# EAGLE board Keyboard_TOP (EAGLE 8.2.2)
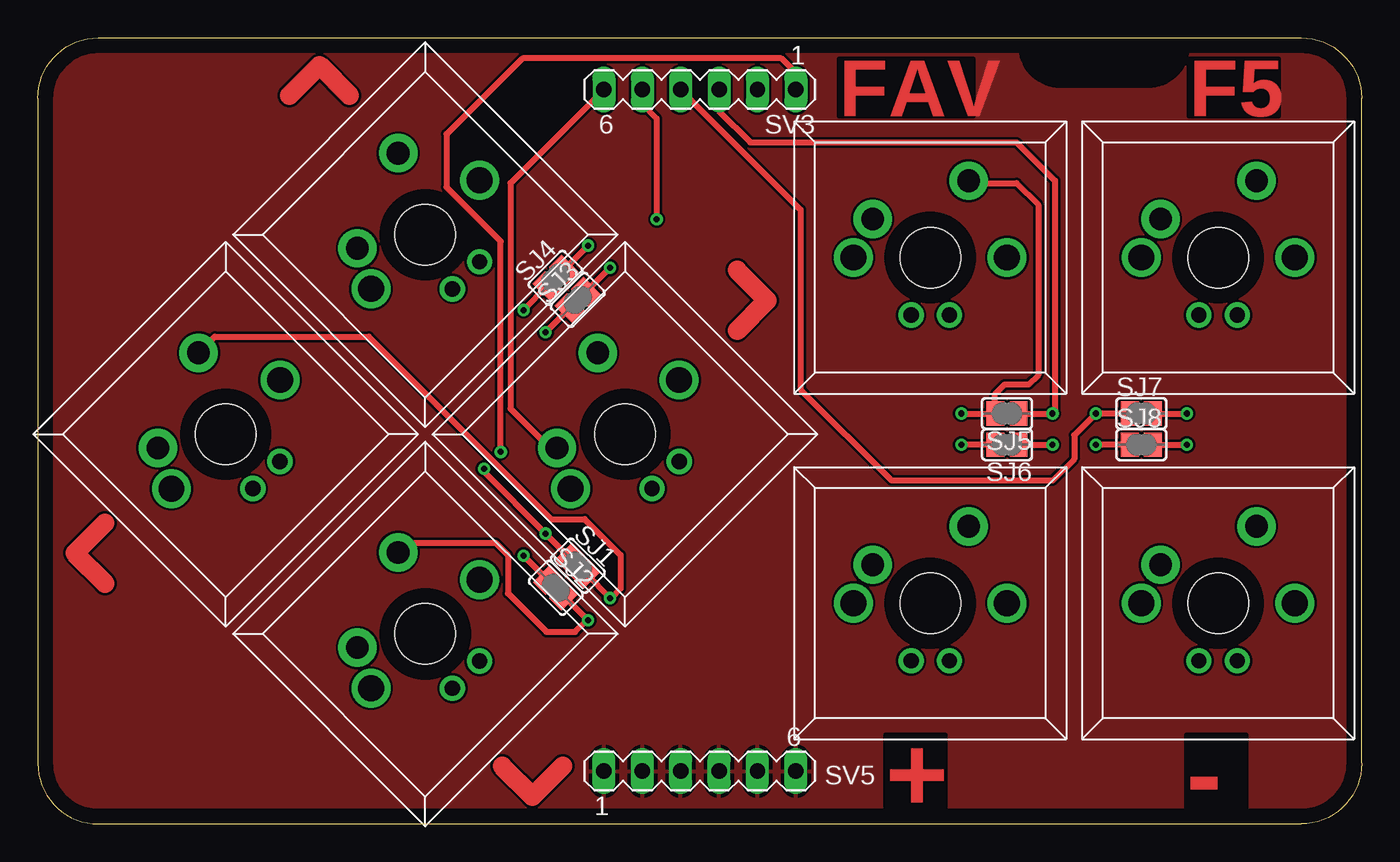
[diagram p0: board, top side]
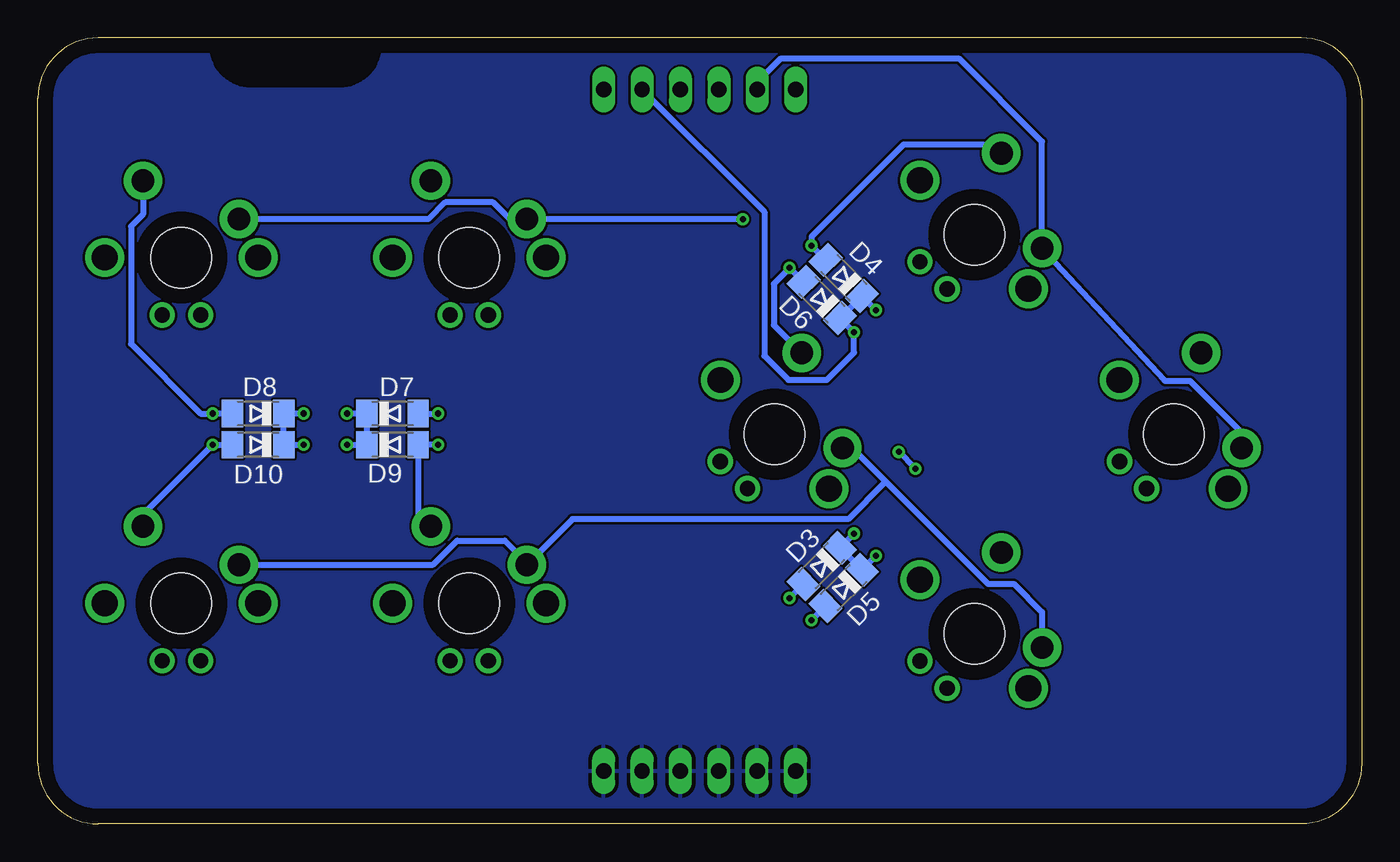
[diagram p1: board, bottom side, seen from below]

Size 87.61 x 52 mm. Coordinates in mm from the lower left corner, seen from the top.
Outline: 4,0 83.61,0 arc90 87.61,4 87.61,48 arc90 83.61,52 4,52 arc90 0,48 0,4 arc90 4,0
Copper layers (1*16): Top 0.035mm / dielectric 1.5mm / Bottom 0.035mm
Design rules "default *": minimum track width 6mil, minimum drill 0.35mm, track to track 6mil, track to pad 6mil, pad to pad 6mil, via to via 6mil, smd to smd 6mil, copper to edge 40mil, drill to drill 6mil, minimum pad ring 10mil, minimum via ring 8mil, stop-mask expansion 4mil, vias tented up to drill 0mil, thermal gap 10mil
tRestrict: area 65.1,48.9 to 76,51.9
bRestrict: area 65.1,48.9 to 76,51.9

## Footprints (pad centres in the part's own frame; a part is rotated, then mirrored left to right if it is on the bottom)
MINIMELF = smd 1.4 x 1.8: A 1.7,0; C -1.7,0
SJC = smd 1.168 x 1.6: 1 -0.762,0; 2 0.762,0
MA06-1 = drill 1.016 long: 1 -6.35,0; 2 -3.81,0; 3 -1.27,0; 4 1.27,0; 5 3.81,0; 6 6.35,0
CHERRY-MX-LED = drill 1.016 pad 1.676: LED1 -1.27,-3.81; LED2 1.27,-3.81 | drill 1.714 pad 1.93: P$3 -5.08,0; P$4 5.08,0 | drill 1.5 pad 2.54: SW1 -3.81,2.54; SW2 2.54,5.08 | hole 4: 0,0

## Placement (x,y rotation side)
D3  [MINIMELF]  35.74,17.07 225 bottom
D4  [MINIMELF]  34.27,36.12 135 bottom
D5  [MINIMELF]  34.28,15.61 225 bottom
D6  [MINIMELF]  35.73,34.66 135 bottom
D7  [MINIMELF]  64.14,27.15 0 bottom
D8  [MINIMELF]  73.03,27.15 180 bottom
D9  [MINIMELF]  64.14,25.08 0 bottom
D10  [MINIMELF]  73.03,25.08 180 bottom
SJ1  [SJC]  35.74,17.07 315 top
SJ2  [SJC]  34.28,15.61 315 top
SJ3  [SJC]  35.73,34.66 45 top
SJ4  [SJC]  34.27,36.12 45 top
SJ5  [SJC]  64.14,27.15 180 top
SJ6  [SJC]  64.14,25.08 180 top
SJ7  [SJC]  73.03,27.15 0 top
SJ8  [SJC]  73.03,25.08 0 top
SV3  [MA06-1]  43.81,48.58 180 top
SV5  [MA06-1]  43.81,3.49 0 top
U$1  CHERRY-MX-LED  [CHERRY-MX-LED]  12.44,25.77 45 top
U$2  CHERRY-MX-LED  [CHERRY-MX-LED]  25.64,38.98 45 top
U$3  CHERRY-MX-LED  [CHERRY-MX-LED]  25.64,12.56 45 top
U$4  CHERRY-MX-LED  [CHERRY-MX-LED]  38.85,25.77 45 top
U$5  CHERRY-MX-LED  [CHERRY-MX-LED]  59.05,37.47 0 top
U$6  CHERRY-MX-LED  [CHERRY-MX-LED]  78.11,37.47 0 top
U$7  CHERRY-MX-LED  [CHERRY-MX-LED]  59.05,14.61 0 top
U$8  CHERRY-MX-LED  [CHERRY-MX-LED]  78.11,14.61 0 top

## Library data of the parts
D3-D10 = diode
SJ1-SJ8 = jumper
SV3 SV5 = con-lstb; OC_FARNELL: unknown; OC_NEWARK: unknown
U$1-U$8 = cherrymx

## Nets
GND: SV5.1 SV5.2 SV5.3 SV5.4 SV5.5 SV5.6
N$15: D3.A SJ1.2 U$1.SW2
N$16: D5.A SJ2.2 U$3.SW2
N$18: D4.A SJ4.2 U$2.SW2
N$20: D6.A SJ3.2 U$4.SW2
N$22: D7.A SJ5.2 U$5.SW2
N$24: D9.A SJ6.2 U$7.SW2
N$26: D8.A SJ7.2 U$6.SW2
N$28: D10.A SJ8.2 U$8.SW2
SW_COL1: D3.C D5.C SJ1.1 SJ2.1 SV3.1
SW_COL2: D4.C D6.C SJ3.1 SJ4.1 SV3.2
SW_COL3: D7.C D9.C SJ5.1 SJ6.1 SV3.3
SW_COL4: D8.C D10.C SJ7.1 SJ8.1 SV3.4
SW_ROW1: SV3.5 U$1.SW1 U$2.SW1 U$5.SW1 U$6.SW1
SW_ROW2: SV3.6 U$3.SW1 U$4.SW1 U$7.SW1 U$8.SW1

## Tracks (layer width: path | path; a pad name or v marks a point on that pad's centre or on a via)
GND
  pour Top: 0,52 88,52 88,0 0,0
  pour Bottom: 0,0 0,52 88,52 88,0
N$8
  Top 1.27: 4.46,19.91 2.46,17.91 4.46,15.9
N$11
  Top 1.27: 20.64,48.17 18.64,50.17 16.64,48.17
N$12
  Top 1.27: 46.27,36.63 48.27,34.63 46.27,32.63
N$13
  Top 1.27: 30.73,3.83 32.73,1.82 34.73,3.83
N$15  (via drill 0.4)
  Top 0.406: SJ1.2 v37.87,14.94 37.96,14.94 38.58,15.56 38.58,17.78 36.2,20.16 33.97,20.16 21.91,32.23 11.71,32.23 U$1.SW2
  Bottom 0.406: D3.A v37.87,14.94
N$16  (via drill 0.4)
  Top 0.406: SJ2.2 v36.41,13.48 36.34,13.48 35.56,12.7 33.66,12.7 31.11,15.24 31.11,17.78 30.32,18.57 24.47,18.57 U$3.SW2
  Bottom 0.406: v36.41,13.48 D5.A
N$18  (via drill 0.4)
  Top 0.406: v36.4,38.25 SJ4.2
  Bottom 0.406: D4.A v36.4,38.25 36.4,38.84 30.32,44.93 25.04,44.93 U$2.SW2
N$20  (via drill 0.4)
  Top 0.406: SJ3.2 v37.86,36.8
  Bottom 0.406: D6.A v37.86,36.8 37.86,36.75 38.89,35.72 38.89,33 U$4.SW2
N$22  (via drill 0.4)
  Top 0.406: U$5.SW2 61.75,42.39 64.77,42.39 66.2,40.96 66.2,29.69 65.56,29.05 63.98,29.05 63.34,28.42 63.34,27.18 | 61.12,27.18 61.15,27.15 v61.12,27.15 63.31,27.15 63.34,27.18 | 63.34,27.18 SJ5.2
  Bottom 0.406: D7.A v61.12,27.15
N$24  (via drill 0.4)
  Top 0.406: SJ6.2 v61.12,25.08
  Bottom 0.406: v61.12,25.08 D9.A | 62.23,24.88 D9.A | D9.A 62.44,20.52 U$7.SW2
N$26  (via drill 0.4)
  Top 0.406: SJ7.2 v76.04,27.15
  Bottom 0.406: D8.A v76.04,27.15 76.83,27.15 81.44,31.75 81.44,39.53 80.64,40.32 U$6.SW2
N$28  (via drill 0.4)
  Top 0.406: SJ8.2 v76.04,25.08
  Bottom 0.406: D10.A v76.04,25.08 80.64,20.48 U$8.SW2
SW_COL1  (via drill 0.4)
  Top 0.406: SJ2.1 v32.15,17.75 | SJ1.1 v33.6,19.2 29.53,23.28 v29.53,23.5 | SV3.1 50.16,49.69 49.21,50.64 32.07,50.64 27.05,45.62 27.05,42.13 30.64,38.54 v30.64,24.61
  Bottom 0.406: v32.15,17.75 D5.C D3.C v33.6,19.2 | v29.53,23.5 v30.64,24.61
SW_COL2  (via drill 0.4)
  Top 0.406: SJ3.1 v33.6,32.53 | SJ4.1 v32.14,33.99
  Bottom 0.406: v32.14,33.99 D4.C D6.C v33.6,32.53 33.6,31.17 35.4,29.37 37.94,29.37 39.53,30.96 39.53,40.48 SV3.2
SW_COL3  (via drill 0.4)
  Top 0.406: SJ6.1 v67.15,25.08 | SV3.3 45.09,47.15 47.15,45.09 64.77,45.09 67.31,42.55 67.31,27.3 v67.15,27.15 SJ5.1
  Bottom 0.406: v67.15,27.15 D7.C D9.C v67.15,25.08
SW_COL4  (via drill 0.4)
  Top 0.406: SJ8.1 v70.01,25.08 | SJ7.1 v70.01,27.15 68.58,25.72 68.58,24.13 67.15,22.7 56.52,22.7 50.48,28.73 50.48,40.64 SV3.4
  Bottom 0.406: v70.01,25.08 D10.C D8.C v70.01,27.15 | 42.55,48.1 SV3.4
SW_ROW1  (via drill 0.4)
  Top 0.406: SV3.5 40.01,47.62 40.96,46.67 v40.96,40.01
  Bottom 0.406: SV3.5 40.01,49.05 38.42,50.64 26.67,50.64 21.15,45.12 U$2.SW1 13.08,29.37 13.01,29.31 11.37,29.31 7.79,25.73 7.79,25.03 U$1.SW1 | v40.96,40.01 U$5.SW1 56.36,40.01 57.47,41.12 60.64,41.12 61.75,40.01 U$6.SW1
SW_ROW2
  Top 0.406: SV3.6 31.27,42.39 31.27,27.46 33.73,25.01 34.23,25.01 U$4.SW1
  Bottom 0.406: 31.58,22.73 31.58,22.55 33.97,20.16 52.23,20.16 55.18,17.21 | 55.18,17.21 U$7.SW1 | U$8.SW1 61.44,17.14 59.85,18.73 56.71,18.73 55.18,17.21 | U$4.SW1 33.73,24.87 31.58,22.73 | U$3.SW1 21.15,14.01 23.02,15.88 24.73,15.88 31.58,22.73

## Text on the board
Top: FAV | F5 | + | -
tStop: FAV | F5 | + | -